# EAGLE board ISCTrainingProgramw2016_(do second) (EAGLE 7.5.0)
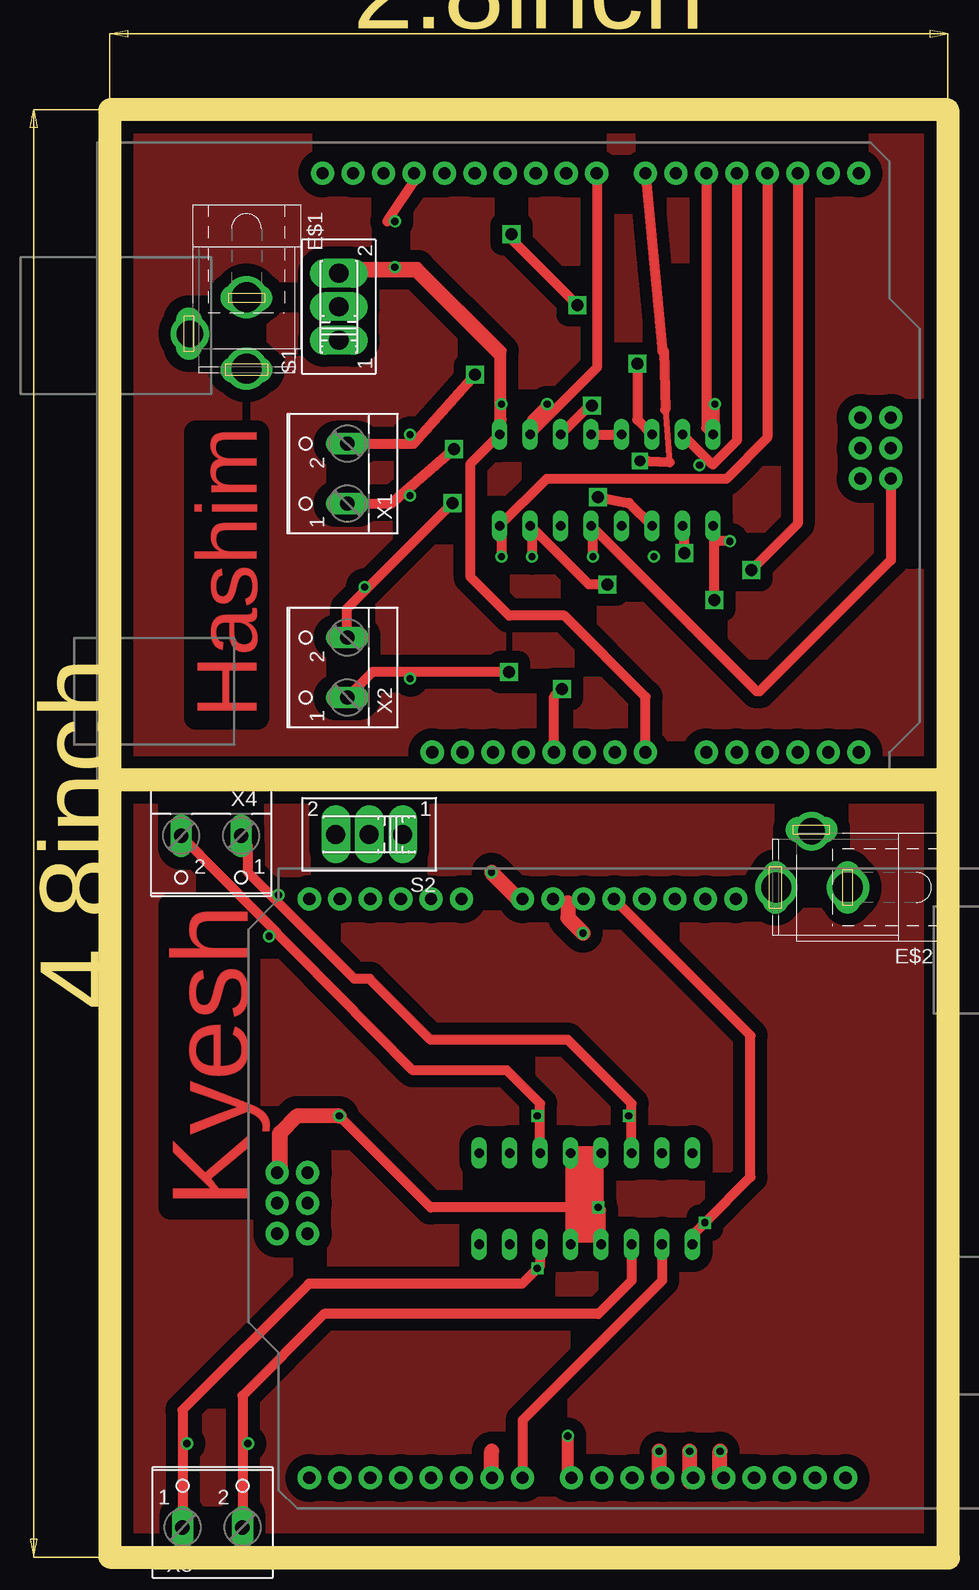
[diagram p0: board, top side]
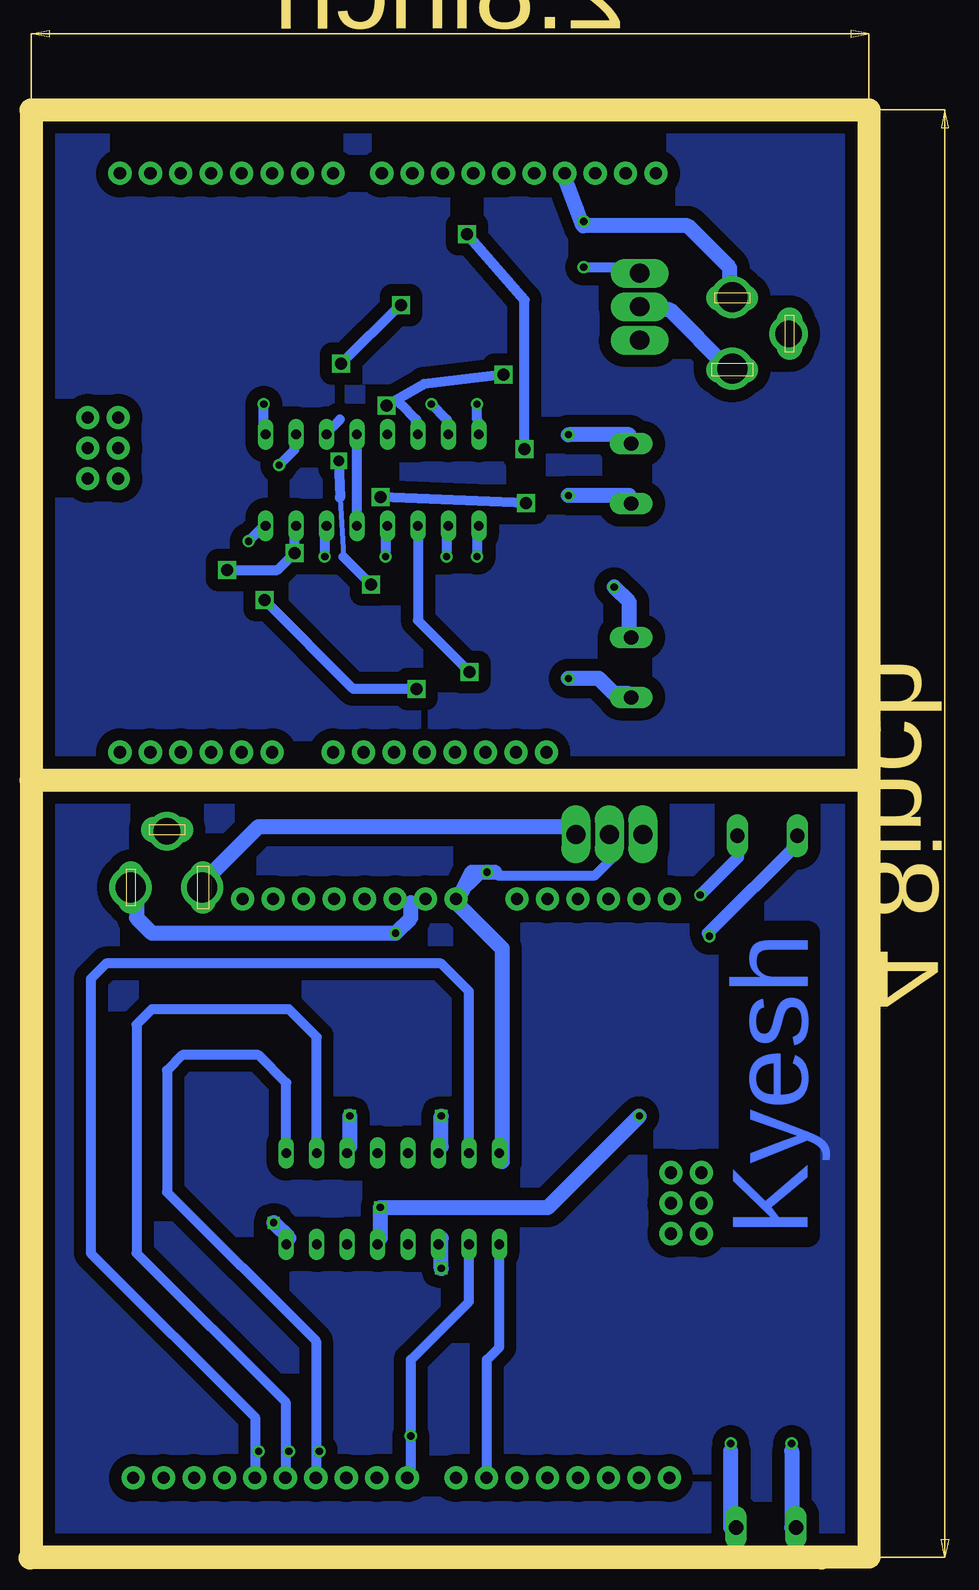
[diagram p1: board, bottom side, seen from below]

Size 69.94 x 120.71 mm. Coordinates in mm from the lower left corner, seen from the top.
Outline: 69.85,64.83 69.85,120.71 0,120.71 0,64.83
Outline: 69.85,64.83 69.85,0.06 0,0.06 0,64.83
Outline: 3.94,0 69.94,0
Outline: 69.85,64.83 0,64.83
Copper layers (1*16): Top 0.035mm / dielectric 1.5mm / Bottom 0.035mm
Design rules "default": minimum track width 10mil, minimum drill 0.6mm, track to track 8mil, track to pad 8mil, pad to pad 8mil, via to via 8mil, smd to smd 8mil, copper to edge 40mil, drill to drill 8mil, minimum pad ring 10mil, minimum via ring 8mil, stop-mask expansion 4mil, vias tented up to drill 0mil, thermal gap 10mil

## Footprints (pad centres in the part's own frame; a part is rotated, then mirrored left to right if it is on the bottom)
5.5-2.5-BARRELCONNECTOR = drill 0.8 pad 2.184 long: 1 -3,0; 2 0,-4.8 | drill 1 pad 2.184 long: 3 3,0 | drill 2.5: P$1 -3.048,0; P$2 2.921,0 | drill 2.2: P$3 0,-4.699
DIP16 = drill 0.8 long: P1 -8.89,-3.81; P2 -6.35,-3.81; P3 -3.81,-3.81; P4 -1.27,-3.81; P5 1.27,-3.81; P6 3.81,-3.81; P7 6.35,-3.81; P8 8.89,-3.81; P9 8.89,3.81; P10 6.35,3.81; P11 3.81,3.81; P12 1.27,3.81; P13 -1.27,3.81; P14 -3.81,3.81; P15 -6.35,3.81; P16 -8.89,3.81
ARDUINO_R3 = drill 1.016 pad 1.93: 3.3V 35.56,2.54; 5V 38.1,2.54; A0 50.8,2.54; A1 53.34,2.54; A2 55.88,2.54; A3 58.42,2.54; A4 60.96,2.54; A5 63.5,2.54; AREF 23.876,50.8; D0 63.5,50.8; D1 60.96,50.8; D2 58.42,50.8; D3 55.88,50.8; D4 53.34,50.8; D5 50.8,50.8; D6 48.26,50.8; D7 45.72,50.8; D8 41.656,50.8; D9 39.116,50.8; D10 36.576,50.8; D11 34.036,50.8; D12 31.496,50.8; D13 28.956,50.8; GND@1 40.64,2.54; GND@2 43.18,2.54; GND@3 26.416,50.8; GND@4 66.18,25.35; IOREF 30.48,2.54; MISO 63.64,30.43; MOSI 66.18,27.89; NC 27.94,2.54; RESET@1 33.02,2.54; RESET@2 63.64,25.35; SCK 63.64,27.89; SCL 18.796,50.8; SDA 21.336,50.8; VCC 66.18,30.43; VIN 45.72,2.54
SLIDE_SWITCH = drill 1.6 long: 1 -2.794,0; 2 0,0; 3 2.794,0
2PIN-SCREW-TERMINAL = drill 1.194 long: 1 -2.5,-1.27; 2 2.5,-1.27

## Placement (x,y rotation side)
E$1  [5.5-2.5-BARRELCONNECTOR]  11.4,102.04 270 top
E$2  [5.5-2.5-BARRELCONNECTOR]  58.51,55.88 180 top
ENABLE  MOTOR_DRIVERDIP16  [DIP16]  39.69,29.94 180 top
J1  ARDUINO_UNO_R3  [ARDUINO_R3]  -1.05,64.61 0 top
J2  ARDUINO_UNO_R3  [ARDUINO_R3]  80.14,57.46 180 top
S1  [SLIDE_SWITCH]  19.1,104.29 90 top
S2  [SLIDE_SWITCH]  21.63,60.31 180 top
U$1  MOTOR_DRIVERDIP16  [DIP16]  41.41,89.84 180 top
X1  [2PIN-SCREW-TERMINAL]  18.54,90.38 90 top
X2  [2PIN-SCREW-TERMINAL]  18.54,74.22 90 top
X3  [2PIN-SCREW-TERMINAL]  8.57,3.81 0 top
X4  [2PIN-SCREW-TERMINAL]  8.45,58.92 180 top

## Library data of the parts
E$1 E$2 ENABLE J1 J2 S1 S2 U$1 = ISCTRainingProgram
X1-X4 = ISCTRainingProgram; MPN: 237-102; OC_FARNELL: unknown; OC_NEWARK: 70K9898

## Nets
ENABLE: ENABLE.P1 J2.D11
GND: U$1.P4 U$1.P5 U$1.P13
GND1: ENABLE.P4 ENABLE.P5 ENABLE.P12
N$1: U$1.P3 X1.1
N$2: U$1.P6 X1.2
N$3: U$1.P11 X2.1
N$4: U$1.P14 X2.2
N$5: J1.5V U$1.P16
N$6: J1.GND@4 U$1.P12
N$7: J1.VIN S1.3 U$1.P8
N$8: J1.D2 U$1.P15
N$9: J1.D3 U$1.P9
N$10: J1.D8 U$1.P7
N$11: J1.D7 U$1.P10
N$12: J1.D4 U$1.P2
N$13: J1.D5 U$1.P1
N$14: ENABLE.P3 X4.1
N$15: ENABLE.P13 J2.GND@4
N$16: ENABLE.P16 J2.5V
N$17: ENABLE.P8 J2.VIN
N$18: ENABLE.P6 X4.2
N$19: ENABLE.P11 X3.1
N$20: ENABLE.P14 X3.2
N$21: ENABLE.P2 J2.D12
N$22: ENABLE.P7 J2.D13
N$23: ENABLE.P9 J2.D6
N$24: ENABLE.P15 J2.D7
N$25: ENABLE.P10 J2.D8
S$22: S2.2

## Tracks (layer width: path | path; a pad name or v marks a point on that pad's centre or on a via)
ENABLE
  Bottom 0.813: ENABLE.P1 48.58,39.6 50.89,41.91 57.24,41.91 58.51,40.64 58.51,30.48 46.1,18.07 J2.D11
GND
  Top 0.813: U$1.P5 U$1.P4
  Bottom 0.813: U$1.P13 U$1.P4
GND1
  Top 0.813: ENABLE.P12 ENABLE.P5 ENABLE.P4
N$1  (via drill 1)
  Top 0.813: X1.1 23.44,87.88 v28.7,92.44 | v33.49,110.34 33.49,109.94 v38.99,104.44 | v43.99,99.54 43.99,94.87 U$1.P3
  Bottom 0.813: v28.7,92.44 28.7,104.84 v33.49,110.34 | v38.99,104.44 39.09,104.44 v43.99,99.54
N$2  (via drill 1)
  Top 0.813: X1.2 25.34,92.88 v30.46,98.64 | v40.2,96.04 40.09,96.14 U$1.P6
  Bottom 0.813: v30.46,98.64 37.09,97.84 v40.2,96.04
N$3  (via drill 1)
  Top 0.813: v33.3,73.84 21.92,73.84 X2.1
  Bottom 0.813: U$1.P11 37.59,78.14 v33.3,73.84
N$4  (via drill 1)
  Top 0.813: X2.2 19.8,79.15 v28.59,87.94 | v40.7,88.44 43.3,87.94 U$1.P14
  Bottom 0.813: v28.59,87.94 v40.7,88.44
N$5  (via drill 1)
  Top 0.813: J1.5V 37.05,71.79 v37.7,72.44 | v50.39,79.84 50.39,85.93 U$1.P16
  Bottom 0.813: v37.7,72.44 42.99,72.44 v50.39,79.84
N$6
  Top 0.813: J1.GND@4 65.12,83.17 54.2,72.24 53.92,72.24 U$1.P12
N$7
  Top 0.813: J1.VIN 44.66,71.77 37.89,78.54 33.3,78.54 30.09,81.74 30.09,91.23 U$1.P8 32.52,100.12 25.49,107.14 19.8,107.14 19.3,107.64 19.3,107.27 S1.3
N$8  (via drill 1)
  Top 0.813: J1.D2 57.37,86.21 v53.49,82.34 | v47.89,83.74 47.89,85.89 U$1.P15
  Bottom 0.813: v53.49,82.34 49.3,82.34 v47.89,83.74
N$9
  Top 0.813: J1.D3 54.82,93.37 51.39,89.94 36.42,89.94 U$1.P9
N$10
  Top 0.813: J1.D8 40.6,99.2 U$1.P7
N$11  (via drill 0.9, 1)
  Top 0.5: 46.32,95.71 46.66,91.31
  Top 0.813: J1.D7 46.09,100.54 46.09,100.64 46.2,100.64 46.32,95.71 | 46.66,91.31 v44.2,91.44 | v41.49,81.14 39.95,81.14 U$1.P10
  Bottom 0.406: 44.09,88.34 43.8,83.44
  Bottom 0.813: v44.2,91.44 44.09,88.44 44.09,88.34 | 43.8,83.44 v41.49,81.14
N$12
  Top 0.813: J1.D4 52.28,93.13 50.3,91.14 50.27,91.14 U$1.P2
N$13
  Top 0.813: J1.D5 49.74,94.2 U$1.P1
N$14
  Top 0.813: ENABLE.P3 43.5,37.87 38.19,43.18 26.76,43.18 21.68,48.26 20.41,48.26 11.52,57.15 11.52,59.37 X4.1
N$15  (via drill 0.6)
  Top 0.813: ENABLE.P13 40.96,28.98 v40.73,29.21 26.76,29.21 v19.14,36.83 15.33,36.83 13.96,35.46 J2.GND@4
  Top 1.27: v19.14,36.83 15.58,36.83 14.19,35.43 14.19,32.13 14.06,32
  Bottom 1.27: 40.73,26.67 v40.73,29.21 26.76,29.21 v19.14,36.83
N$16  (via drill 0.6)
  Top 0.813: ENABLE.P16 48.58,26.9 v49.62,27.94 53.43,31.75 53.43,43.53 J2.5V
  Bottom 1.27: 48.35,26.67 v49.62,27.94
N$17  (via drill 0.6)
  Top 1.27: 34.38,54.61 v31.84,57.15
  Bottom 0.813: 33.11,57.15 32.19,57.15 J2.VIN 30.8,51.3 ENABLE.P8
  Bottom 1.27: 31.2,57.15 v31.84,57.15 33.11,57.15 34.38,54.61 30.57,50.8 30.57,33.02
N$18
  Top 0.813: ENABLE.P6 35.88,37.87 33.11,40.64 25.25,40.64 X4.2
N$19  (via drill 0.6)
  Top 0.813: ENABLE.P11 35.88,24.36 v35.65,24.13 34.38,22.86 16.6,22.86 6.07,12.33 X3.1
  Bottom 1.27: v35.65,24.13 35.65,26.67
N$20
  Top 0.813: X3.2 11.07,13.52 17.87,20.32 40.73,20.32 43.5,23.09 ENABLE.P14
N$21
  Bottom 0.813: ENABLE.P2 46.04,43.41 48.35,45.72 59.78,45.72 61.05,44.45 61.05,25.4 48.64,12.99 J2.D12
N$22
  Bottom 0.813: ENABLE.P7 33.34,47.22 35.65,49.53 63.59,49.53 64.86,48.26 64.86,25.4 51.18,11.72 J2.D13
N$23
  Bottom 0.813: J2.D6 31.84,6.7 31.84,16.51 30.8,17.55 ENABLE.P9
N$24
  Top 0.813: ENABLE.P15 46.04,23.09 34.42,11.47 J2.D7
N$25  (via drill 0.6)
  Top 1.016: 38.19,6.35 v38.19,10.16
  Bottom 0.813: J2.D8 38.19,6.95 v38.19,10.16 38.19,16.51 33.34,21.36 ENABLE.P10
N$26  (via drill 0.6)
  Bottom 1.27: 43.27,34.29 v43.27,36.83
N$27  (via drill 0.6)
  Bottom 1.27: 35.65,34.29 v35.65,36.83
N$28
  Top 0.813: 40.73,33.02 40.73,26.67 38.19,26.67
S$1
  Bottom 1.27: 11.6,105.24 11.6,107.54 15.1,111.04 23.84,111.04 25.4,115.14
S$2
  Bottom 1.27: 11.4,99.14 11.7,99.14 16.59,104.04 19.09,104.04 19.3,104.24
S$3  (via drill 0.6)
  Bottom 1.27: 19.97,77.12 19.97,79.66 v21.23,80.93
S$4  (via drill 0.6)
  Bottom 1.27: 19.97,72.04 21.23,72.04 22.51,73.31 v25.05,73.31
S$5  (via drill 0.6)
  Bottom 1.27: 19.97,88.55 v25.05,88.55
S$6  (via drill 0.6)
  Bottom 1.27: 19.97,93.63 v25.05,93.63
S$7  (via drill 0.6)
  Bottom 0.813: v23.77,107.6 19.97,107.6
S$8  (via drill 0.6)
  Top 0.813: 32.66,86.01 v32.66,83.47
  Bottom 0.813: 32.66,86.01 v32.66,83.47
S$9  (via drill 0.6)
  Top 0.813: 35.2,86.01 v35.2,83.47
  Bottom 0.813: 35.2,86.01 v35.2,83.47
S$10  (via drill 0.6)
  Top 0.813: v40.28,83.47 40.28,86.01
  Bottom 0.813: 40.28,86.01 v40.28,83.47
S$11  (via drill 0.6)
  Bottom 0.813: 45.37,86.01 v45.37,83.47
S$12
  Bottom 0.813: 47.91,86.01 47.91,83.47
S$13  (via drill 0.6)
  Top 0.813: v51.71,84.74 50.45,84.74
  Bottom 0.813: 50.45,86.01 v51.71,84.74
S$14  (via drill 0.6)
  Top 0.813: 50.45,93.63 v50.45,96.17
  Bottom 0.813: 50.45,93.63 v50.45,96.17
S$15  (via drill 0.6)
  Bottom 0.813: 47.91,93.63 47.91,92.36 v49.17,91.09
S$16
  Bottom 0.813: 45.37,93.63 44.09,94.9
S$17
  Bottom 0.813: 37.74,93.63 37.74,94.9 39.02,96.17
S$18  (via drill 0.6)
  Top 0.813: 35.2,94.9 v36.48,96.17
  Bottom 0.813: 35.2,94.9 v36.48,96.17
S$19  (via drill 0.6)
  Top 0.813: 32.66,94.9 v32.66,96.17 | v32.66,96.17 32.66,100.62 25.68,107.6 19.97,107.6 | 32.66,93.63 v32.66,96.17
  Bottom 0.813: 32.66,94.9 v32.66,96.17
S$20
  Top 0.813: 25.68,115.22 23.14,111.41
S$21  (via drill 0.6)
  other vias: 23.77,111.41
S$22
  Bottom 0.813: 21.63,59.74 S2.2
S$23
  Bottom 1.27: 55.97,55.88 50.89,60.96 24.22,60.96
S$24  (via drill 0.6)
  Top 1.27: 38.19,54.61 38.19,53.34 v39.46,52.07
  Bottom 1.27: 61.05,55.88 61.05,53.34 59.78,52.07 v39.46,52.07 38.19,53.34 38.19,54.61
S$25
  Top 1.27: 31.84,6.35 31.84,8.89
S$26  (via drill 0.6)
  Top 1.27: 45.81,6.35 v45.81,8.89
S$27  (via drill 0.6)
  Top 1.27: 48.35,6.35 v48.35,8.89
S$28  (via drill 0.6)
  Top 1.27: 50.89,6.35 v50.89,8.89
S$29  (via drill 0.6)
  other vias: 13.3,51.82
S$30  (via drill 0.6)
  Bottom 1.016: v14.06,55.25 10.88,58.42 10.88,59.05
S$31  (via drill 0.6)
  other vias: 6.44,9.53
S$32  (via drill 0.6)
  other vias: 11.52,9.53
S$33
  Bottom 1.27: 11.52,2.54 11.52,8.89
S$34
  Bottom 1.27: 6.44,8.89 6.44,2.54
S$35
  Bottom 1.016: 13.42,52.07 5.8,59.69
S$36
  Bottom 0.813: 30.95,56.9 22.82,56.9 21.3,58.42
S$37
  pour Bottom (isolate 1.016): 0,120.71 69.85,120.71 69.85,0.06 0,0.06
S$38
  pour Top (isolate 1.016): 0,120.71 69.85,120.71 69.85,0.06 0,0.06
(copper drawn outside any net)
  shapes: Top area x1

## Text on the board
Top: Hashim | Kyesh
Bottom: Kyesh